# EAGLE board citizen_science_flora (EAGLE 9.6.2), part 1 of 2
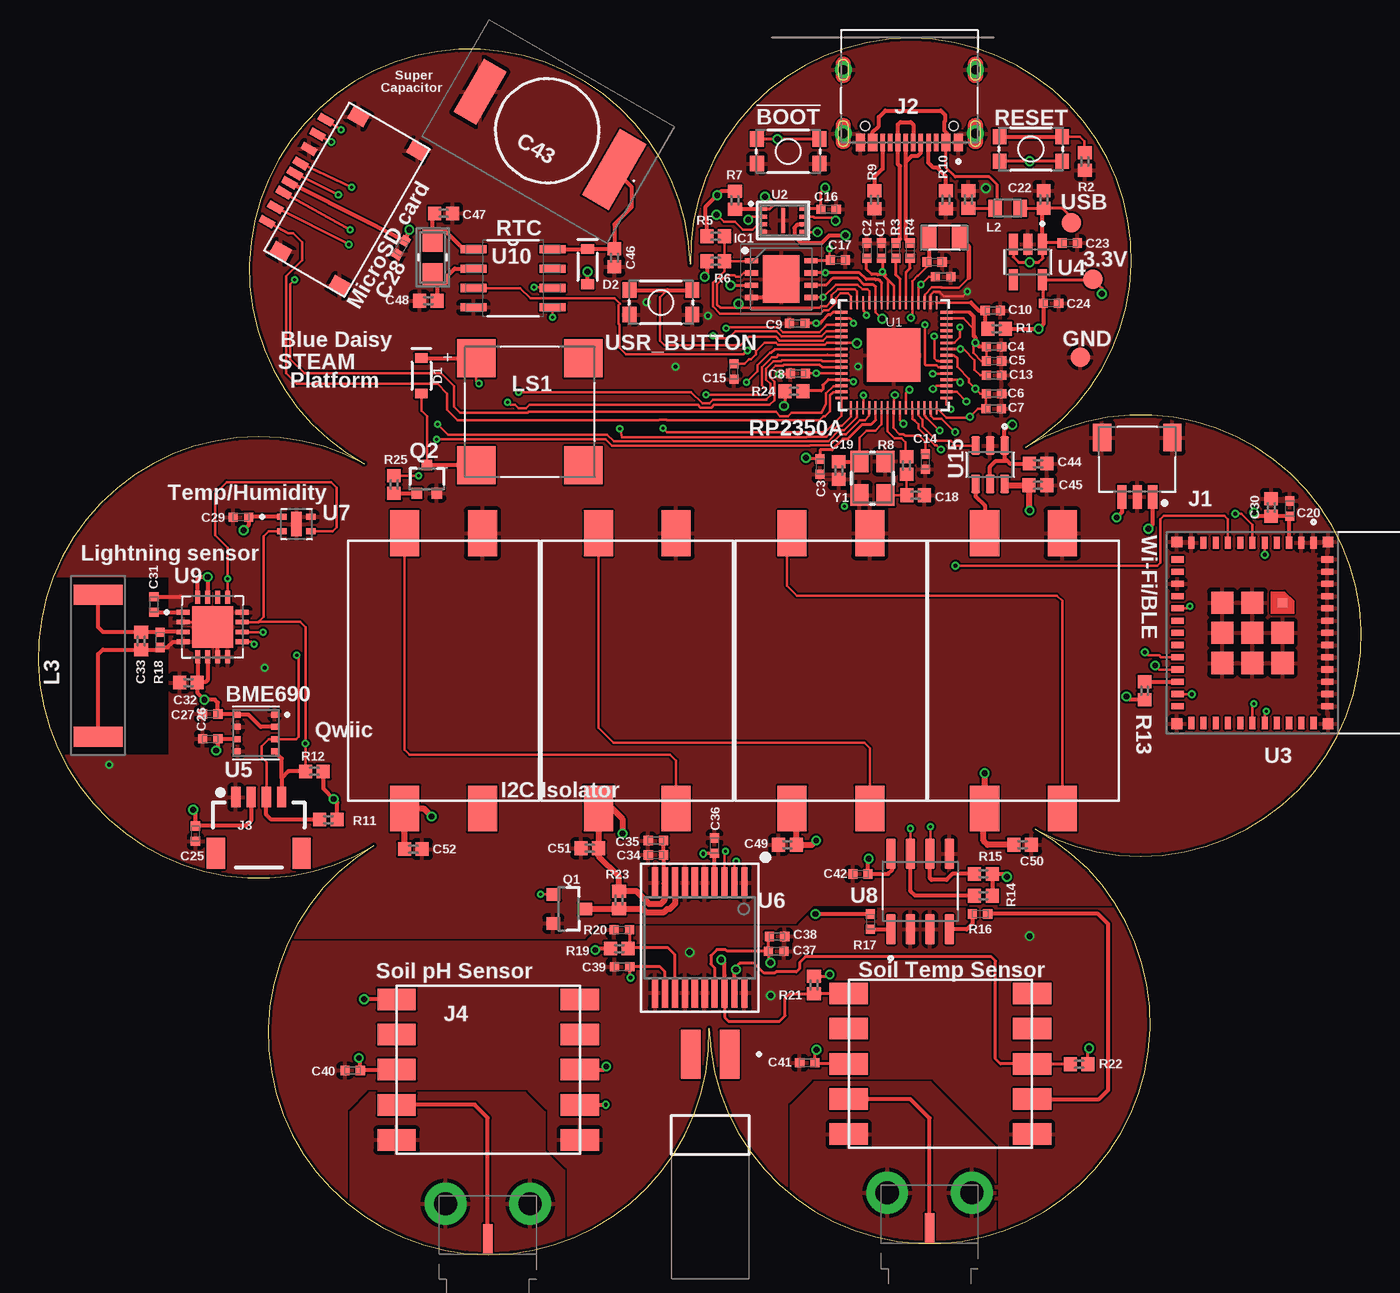
[diagram p0: board, top side]
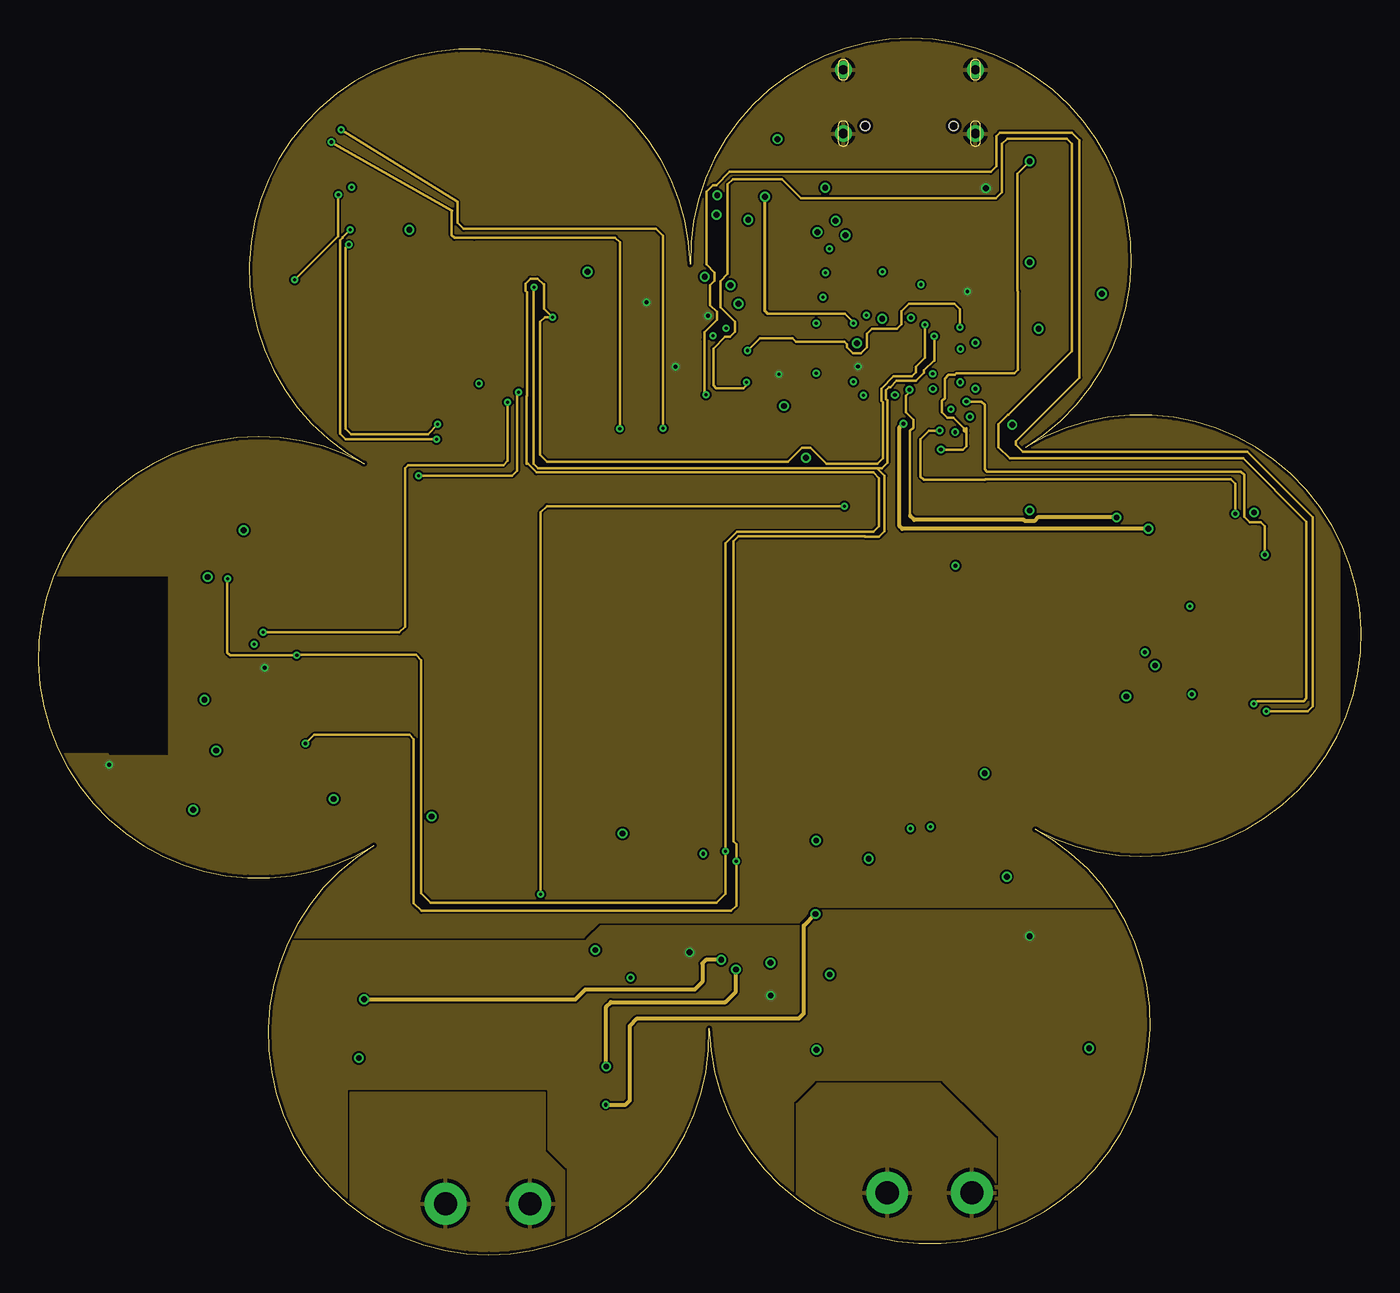
[diagram p1: board, inner layer Route2]
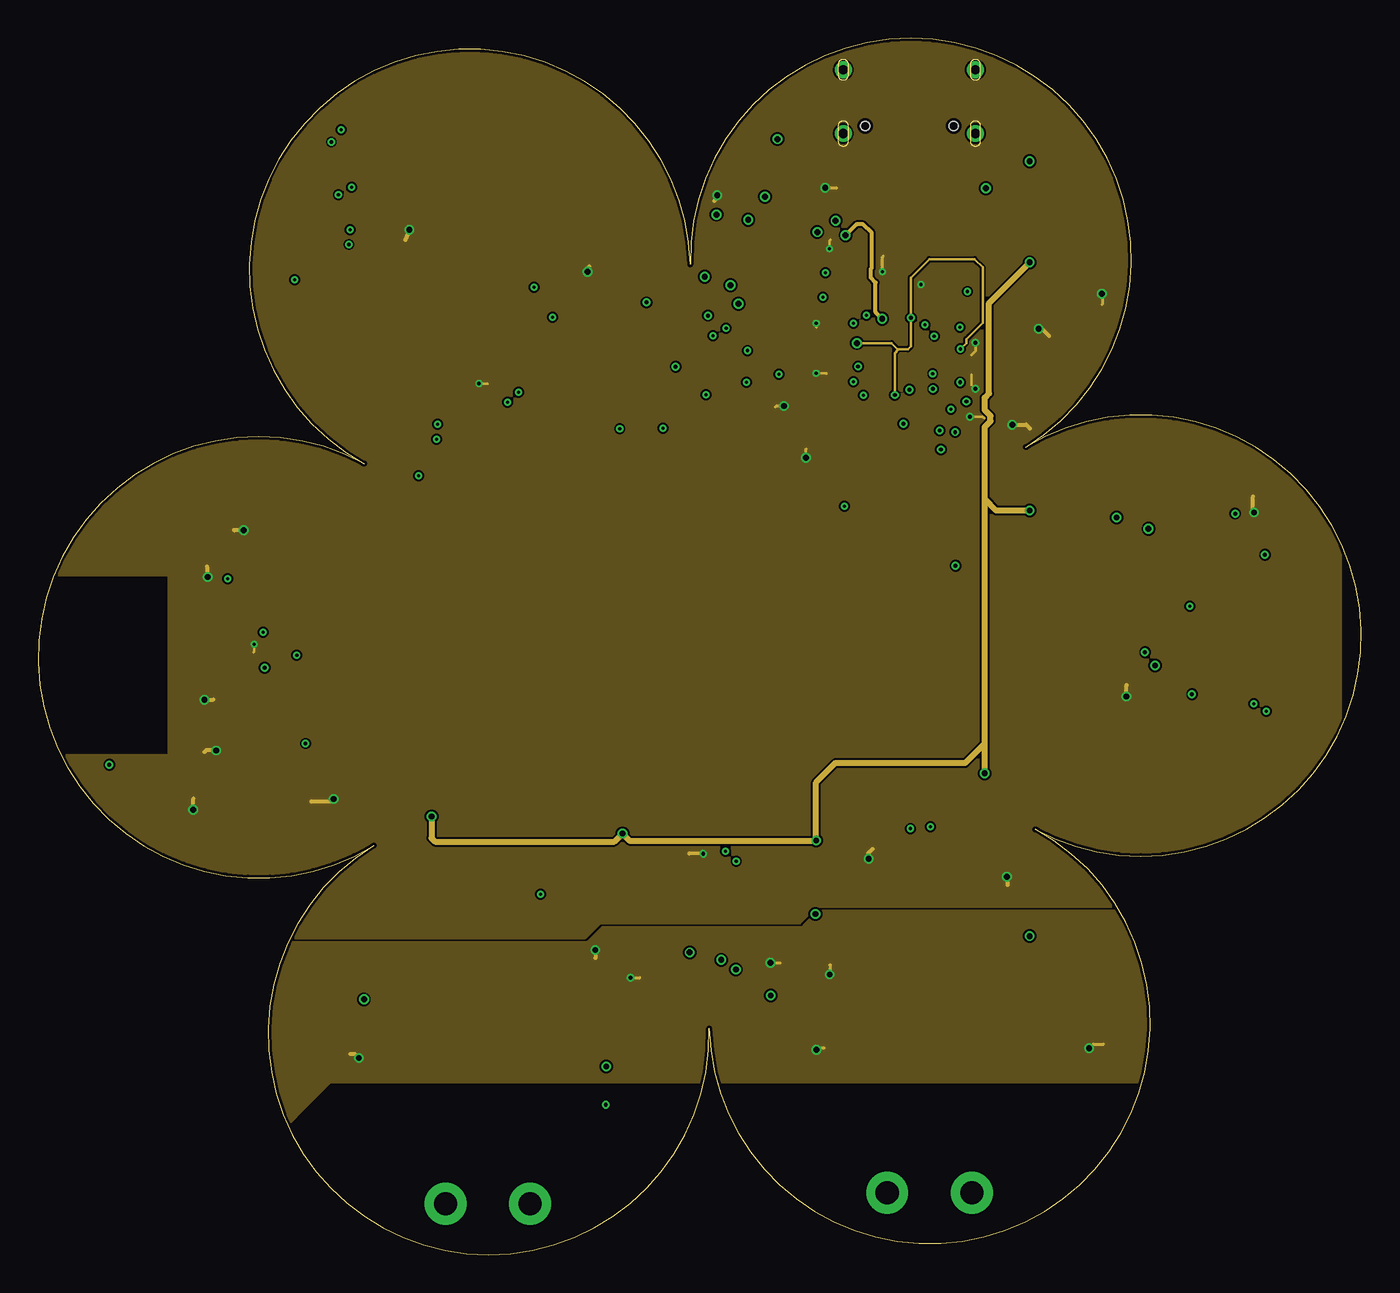
[diagram p2: board, inner layer Route15]
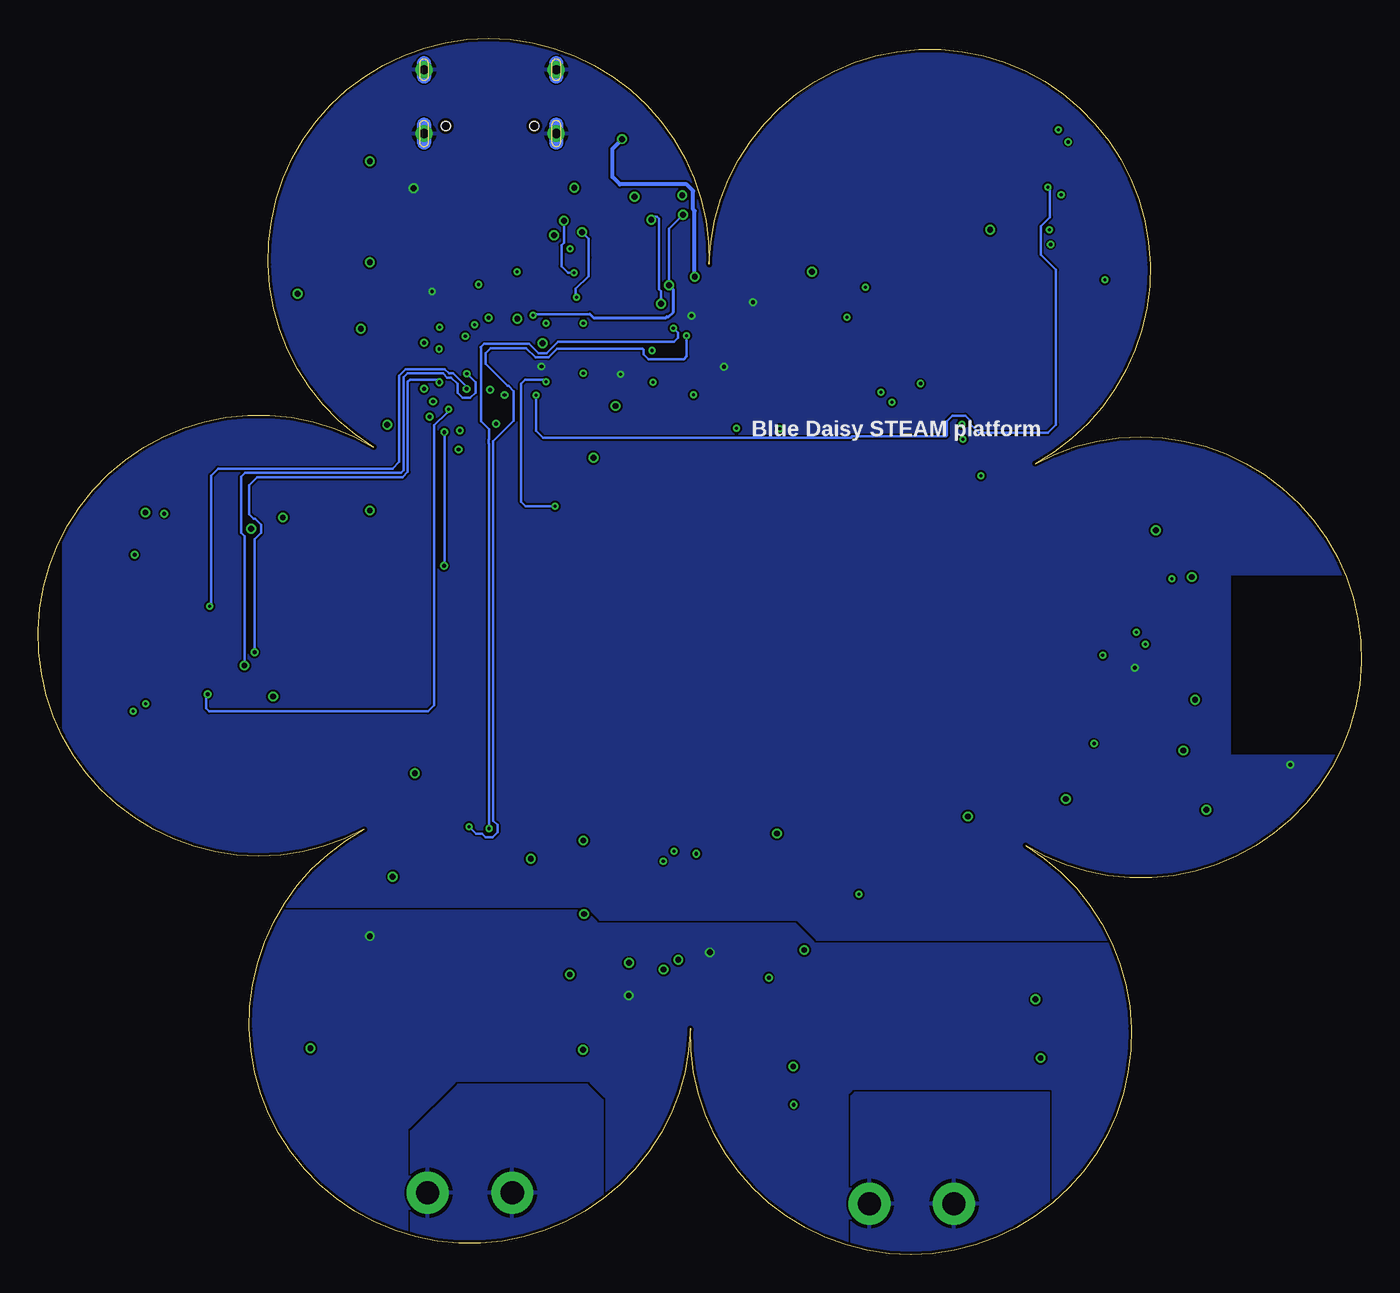
[diagram p3: board, bottom side, seen from below]

Size 86.58 x 79.57 mm. Coordinates in mm from the lower left corner, seen from the top.
Outline: 42.67,64.78 arc240 21.34,51.74 arc240 21.95,26.75 arc240 43.91,14.79 arc240 65.24,27.82 arc240 64.62,52.82 arc240 42.67,64.78
Copper layers (1+2*15+16): Top 0.035mm / dielectric 0.2mm / Route2 0.0175mm / dielectric 1.065mm / Route15 0.0175mm / dielectric 0.2mm / Bottom 0.035mm
Design rules "jlcpcb-4layers": minimum track width 3.5mil, minimum drill 0.2mm, track to track 5mil, track to pad 0.2mm, pad to pad 5mil, via to via 0.5mm, smd to smd 5mil, copper to edge 0.2mm, drill to drill 6mil, minimum pad ring 10mil, minimum via ring 0.13mm, stop-mask expansion 0.05mm, vias tented up to drill 16mil, thermal gap 10mil

## Footprints (pad centres in the part's own frame; a part is rotated, then mirrored left to right if it is on the bottom)
B1,27 = smd 1.27 x 1.27: TP 0,0
TACTILE_SWITCH_SMD_4.6X2.8MM = smd 0.9 x 1: 1 -2.05,-0.8; 2 2.05,-0.8; 3 2.05,0.8; 4 -2.05,0.8
0402-TIGHT = smd 0.6 x 0.6: 1 -0.5,0; 2 0.5,0
0402 = smd 0.85 x 0.9: 1 -0.58,0; 2 0.58,0
RSCSK2043R3D01004T = smd 5 x 2: 1 0,5.075 | smd 4 x 1.7: 2 0,-5.075
SOD-323 = smd 0.63 x 0.83: A 1.15,0; C -1.15,0
SON80P400X400X50-9N = smd 0.85 x 0.35: 1 -1.95,1.2; 2 -1.95,0.4; 3 -1.95,-0.4; 4 -1.95,-1.2; 5 1.95,-1.2; 6 1.95,-0.4; 7 1.95,0.4; 8 1.95,1.2 | smd 2.4 x 3.1: 9 0,0
JST_SM03B-SRSS-TB(LF)(SN) = smd 0.6 x 1.55: 1 -1,0; 2 0,0; 3 1,0 | smd 1.2 x 1.8: S1 -2.3,-3.875; S2 2.3,-3.875
HRO_TYPE-C-31-M-12 = smd 0.6 x 1.14: A1_B12 -3.2,4.75; A4_B9 -2.4,4.75; B1_A12 3.2,4.75; B4_A9 2.4,4.75 | smd 0.3 x 1.14: A5 -1.25,4.75; A6 -0.25,4.75; A7 0.25,4.75; A8 1.25,4.75; B5 1.75,4.75; B6 0.75,4.75; B7 -0.75,4.75; B8 -1.75,4.75 | drill 0.6 pad 0.9: S1 -4.325,4.17; S2 4.325,4.17; S3 -4.325,0; S4 4.325,0 | hole 0.6: -2.89,3.68; 2.89,3.68
1X04_1MM_RA = smd 0.6 x 1.35: 1 -1.5,0; 2 -0.5,0; 3 0.5,0; 4 1.5,0 | smd 1.2 x 2: NC1 2.8,-3.675; NC2 -2.8,-3.675
60312202114511 = smd 0.61 x 1.97: 1 0,-2.325 | drill 1.52: 2 -2.77,0; 3 2.77,0
SAMTEC_TSM-102-02-S-SH = smd 1.27 x 3.18: 01 -1.27,-5.28; 02 1.27,-5.28
INDC1608X100N = smd 0.89 x 1.11: 1 -0.814,0; 2 0.814,0
MA5532-AE = smd 1.3 x 3.2: 1 -4.65,0; 2 4.65,0
IND_LQH2MCN120K02L = smd 1 x 1.6: 1 -1,0; 2 1,0
XDCR_CMT-8504-100-SMT-TR = smd 2.5 x 2.5: 1 3.5,3.5; 2 3.5,-3.5; N -3.5,-3.5; P -3.5,3.5
SOT23-3 = smd 0.8 x 0.9: 1 -0.95,-1; 2 0.95,-1; 3 0,1.1
SOT323 = smd 0.7 x 0.7: 1 -0.65,-0.925; 2 0.65,-0.925; 3 0,0.925
RP2350A = smd 0.875 x 0.2: 1 -3.437,2.8; 2 -3.437,2.4; 3 -3.437,2; 4 -3.437,1.6; 5 -3.437,1.2; 6 -3.437,0.8; 7 -3.437,0.4; 8 -3.437,0; 9 -3.437,-0.4; 10 -3.437,-0.8; 11 -3.437,-1.2; 12 -3.437,-1.6; 13 -3.437,-2; 14 -3.437,-2.4; 15 -3.437,-2.8; 31 3.437,-2.8; 32 3.437,-2.4; 33 3.437,-2; 34 3.437,-1.6; 35 3.437,-1.2; 36 3.437,-0.8; 37 3.437,-0.4; 38 3.437,0; 39 3.437,0.4; 40 3.437,0.8; 41 3.437,1.2; 42 3.437,1.6; 43 3.437,2; 44 3.437,2.4; 45 3.437,2.8 | smd 0.2 x 0.875: 16 -2.8,-3.437; 17 -2.4,-3.437; 18 -2,-3.437; 19 -1.6,-3.437; 20 -1.2,-3.437; 21 -0.8,-3.437; 22 -0.4,-3.437; 23 0,-3.437; 24 0.4,-3.437; 25 0.8,-3.437; 26 1.2,-3.437; 27 1.6,-3.437; 28 2,-3.437; 29 2.4,-3.437; 30 2.8,-3.437; 46 2.8,3.437; 47 2.4,3.437; 48 2,3.437; 49 1.6,3.437; 50 1.2,3.437; 51 0.8,3.437; 52 0.4,3.437; 53 0,3.437; 54 -0.4,3.437; 55 -0.8,3.437; 56 -1.2,3.437; 57 -1.6,3.437; 58 -2,3.437; 59 -2.4,3.437; 60 -2.8,3.437 | smd 3.5 x 3.5: EPAD 0,0
APS6404L-3SQR-ZR = smd 0.4 x 0.25: 1 -1.25,0.75; 2 -1.25,0.25; 3 -1.25,-0.25; 4 -1.25,-0.75; 5 1.25,-0.75; 6 1.25,-0.25; 7 1.25,0.25; 8 1.25,0.75 | smd 0.2 x 1.6: 9 0,0
XCVR_ESP32-C3-MINI-1-N4 = smd 0.8 x 0.4: 1 -5.9,1.3; 2 -5.9,0.5; 3 -5.9,-0.3; 4 -5.9,-1.1; 5 -5.9,-1.9; 6 -5.9,-2.7; 7 -5.9,-3.5; 8 -5.9,-4.3; 9 -5.9,-5.1; 10 -5.9,-5.9; 11 -5.9,-6.7; 25 5.9,-6.7; 26 5.9,-5.9; 27 5.9,-5.1; 28 5.9,-4.3; 29 5.9,-3.5; 30 5.9,-2.7; 31 5.9,-1.9; 32 5.9,-1.1; 33 5.9,-0.3; 34 5.9,0.5; 35 5.9,1.3 | smd 0.4 x 0.8: 12 -4.8,-7.6; 13 -4,-7.6; 14 -3.2,-7.6; 15 -2.4,-7.6; 16 -1.6,-7.6; 17 -0.8,-7.6; 18 0,-7.6; 19 0.8,-7.6; 20 1.6,-7.6; 21 2.4,-7.6; 22 3.2,-7.6; 23 4,-7.6; 24 4.8,-7.6; 36 4.8,2.2; 37 4,2.2; 38 3.2,2.2; 39 2.4,2.2; 40 1.6,2.2; 41 0.8,2.2; 42 0,2.2; 43 -0.8,2.2; 44 -1.6,2.2; 45 -2.4,2.2; 46 -3.2,2.2; 47 -4,2.2; 48 -4.8,2.2 | smd 0.6 x 0.6: 49_1 -1.975,-0.725 | smd 1.45 x 1.45: 49_2 0,-0.725; 49_3 1.975,-0.725; 49_4 1.975,-2.7; 49_5 1.975,-4.675; 49_6 0,-4.675; 49_7 -1.975,-4.675; 49_8 -1.975,-2.7; 49_9 0,-2.7 | smd 0.7 x 0.7: 50 5.95,2.25; 51 5.95,-7.65; 52 -5.95,-7.65; 53 -5.95,2.25
SOT95P280X145-5N = smd 1.39 x 0.58: 1 -1.165,0.95; 2 -1.165,0; 3 -1.165,-0.95; 4 1.165,-0.95; 5 1.165,0.95
IC_BME688 = smd 0.4 x 0.4: 1 1.2,1.2; 2 1.2,0.4; 3 1.2,-0.4; 4 1.2,-1.2; 5 -1.2,-1.2; 6 -1.2,-0.4; 7 -1.2,0.4; 8 -1.2,1.2
SSOP20 = smd 0.4 x 2: P1 -2.925,-3.6; P2 -2.275,-3.6; P3 -1.625,-3.6; P4 -0.975,-3.6; P5 -0.325,-3.6; P6 0.325,-3.6; P7 0.975,-3.6; P8 1.625,-3.6; P9 2.275,-3.6; P10 2.925,-3.6; P11 2.925,3.6; P12 2.275,3.6; P13 1.625,3.6; P14 0.975,3.6; P15 0.325,3.6; P16 -0.325,3.6; P17 -0.975,3.6; P18 -1.625,3.6; P19 -2.275,3.6; P20 -2.925,3.6
XDCR_ENS210-LQFM = smd 0.6 x 0.4: 1 -0.95,0.475; 2 -0.95,-0.475; 3 0.95,-0.475; 4 0.95,0.475 | smd 0.7 x 1.6: 5 0,0
SOIC127P599X175-8N = smd 1.97 x 0.6: 1 -2.47,1.905; 2 -2.47,0.635; 3 -2.47,-0.635; 4 -2.47,-1.905; 5 2.47,-1.905; 6 2.47,-0.635; 7 2.47,0.635; 8 2.47,1.905
QFN65P400X400X80-17N = smd 0.84 x 0.32: 1 -1.935,0.975; 2 -1.935,0.325; 3 -1.935,-0.325; 4 -1.935,-0.975; 9 1.935,-0.975; 10 1.935,-0.325; 11 1.935,0.325; 12 1.935,0.975 | smd 0.32 x 0.84: 5 -0.975,-1.935; 6 -0.325,-1.935; 7 0.325,-1.935; 8 0.975,-1.935; 13 0.975,1.935; 14 0.325,1.935; 15 -0.325,1.935; 16 -0.975,1.935 | smd 2.7 x 2.7: 17 0,0
SOIC127P600X175-8N = smd 1.702 x 0.533: 1 -2.591,1.905; 2 -2.591,0.635; 3 -2.591,-0.635; 4 -2.591,-1.905; 5 2.591,-1.905; 6 2.591,-0.635; 7 2.591,0.635; 8 2.591,1.905
OPS-S56AAF5 = smd 1.9 x 3: P$1 -2.54,-9; P$2 2.54,-9; P$3 2.54,9; P$4 -2.54,9
SOT95P280X145-6N = smd 1.21 x 0.58: 1 -1.255,0.95; 2 -1.255,0; 3 -1.255,-0.95; 4 1.255,-0.95; 5 1.255,0; 6 1.255,0.95
MICROSDCARD = smd 0.5 x 1: G1 0.2,0; P1 3.85,0; P2 2.75,0; P3 1.65,0; P4 0.9,0; P5 -0.55,0; P6 -1.65,0; P7 -2.75,0; P8 -3.85,0 | smd 0.95 x 1.2: P$1 -5.1,1.75; P$2 -5.1,6.2; P$3 5.1,6.2; P$4 5.1,1.75
PH_SENSOR = smd 2.5 x 1.4: P$1 -6,4.6; P$2 -6,2.3; P$3 -6,0; P$4 -6,-2.3; P$5 -6,-4.6; P$6 6,-4.6; P$7 6,-2.3; P$8 6,0; P$9 6,2.3; P$10 6,4.6
XTAL_FC-135_EPS = smd 1.422 x 1.295: 1 -1.092,0; 2 1.092,0
CRYSTAL-SMD-3.2X2.5MM = smd 1.4 x 1.2: 1 -1.1,-0.85; 2 1.1,-0.85; 3 1.1,0.85; 4 -1.1,0.85

## Placement (x,y rotation side)
3.3V  TPB1,27  [B1,27]  69.02,63.81 0 top
!BOOT  MOMENTARY-SWITCH-SPST-SMD-4.6X2.8MM  [TACTILE_SWITCH_SMD_4.6X2.8MM]  49.08,72.17 0 top
C1  0.1uF  [0402-TIGHT]  55.18,65.67 90 top
C2  0.1uF  [0402-TIGHT]  54.24,65.67 90 top
C3  0.1uF  [0402-TIGHT]  51.16,51.54 270 top
C4  0.1uF  [0402-TIGHT]  62.54,59.39 0 top
C5  0.1uF  [0402-TIGHT]  62.54,58.45 0 top
C6  0.1uF  [0402-TIGHT]  62.54,56.32 0 top
C7  0.1uF  [0402-TIGHT]  62.52,55.33 0 top
C8  0.1uF  [0402-TIGHT]  49.71,57.64 180 top
C9  0.1uF  [0402-TIGHT]  49.66,60.92 180 top
C10  4.7uF  [0402-TIGHT]  62.47,61.75 0 top
C11  4.7uF  [0402-TIGHT]  58.66,64.93 0 top
C12  4.7uF  [0402-TIGHT]  59.21,63.96 0 top
C13  0.1uF  [0402-TIGHT]  62.54,57.51 0 top
C14  4.7uF  [0402-TIGHT]  58.05,51.87 270 top
C15  0.1uF  [0402-TIGHT]  45.52,57.77 270 top
C16  0.1uF  [0402-TIGHT]  51.72,68.38 0 top
C17  0.1uF  [0402-TIGHT]  52.33,65.06 180 top
C18  15pF  [0402]  57.41,49.66 0 top
C19  15pF  [0402]  52.38,51.29 270 top
C20  10uF  [0402-TIGHT]  81.9,48.8 90 top
C21  0.1uF  [0402]  60.86,69.02 90 top
C22  0.1uF  [0402]  65.79,69.02 90 top
C23  10uF  [0402-TIGHT]  67.49,66.17 180 top
C24  10uF  [0402-TIGHT]  66.28,62.24 180 top
C25  0.1uF  [0402-TIGHT]  10.29,27.54 270 top
C26  0.1uF  [0402-TIGHT]  11.26,33.74 180 top
C27  0.1uF  [0402-TIGHT]  11.26,35.36 180 top
C28  0.1uF  [0402-TIGHT]  23.76,65.87 240 top
C29  0.1uF  [0402-TIGHT]  13.27,48.24 180 top
C30  0.1uF  [0402]  80.68,48.88 90 top
C31  10uF  [0402-TIGHT]  7.58,42.53 90 top
C32  1.0uF  [0402]  9.84,37.42 180 top
C33  1nF  [0402]  6.74,40.14 270 top
C34  0.1uF  [0402-TIGHT]  40.42,26.14 0 top
C35  10uF  [0402-TIGHT]  40.42,27.08 0 top
C36  0.1uF  [0402-TIGHT]  44.25,26.75 270 top
C37  10uF  [0402-TIGHT]  48.29,19.84 0 top
C38  0.1uF  [0402-TIGHT]  48.34,20.81 0 top
C39  0.1uF  [0402-TIGHT]  38.21,18.83 180 top
C40  0.1uF  [0402-TIGHT]  20.58,12.05 0 top
C41  0.1uF  [0402-TIGHT]  50.32,12.55 0 top
C42  0.1uF  [0402-TIGHT]  53.8,24.9 0 top
C43  RSCSK2043R3D01004T  [RSCSK2043R3D01004T]  33.31,73.51 240 top
C44  0.1uF  [0402]  65.44,51.75 180 top
C45  0.1uF  [0402]  65.41,50.32 0 top
C46  0.1uF  [0402]  37.7,65.21 270 top
C47  12pF  [0402]  26.52,68.1 180 top
C48  12pF  [0402]  25.53,62.39 0 top
C49  0.1uF  [0402]  49.03,26.8 180 top
C50  0.1uF  [0402]  64.42,26.8 0 top
C51  0.1uF  [0402]  36.1,26.58 180 top
C52  0.1uF  [0402]  24.54,26.52 0 top
D1  1N4148  [SOD-323]  25.08,57.49 270 top
D2  1N5819  [SOD-323]  35.95,64.62 270 top
GND  TPB1,27  [B1,27]  68.18,58.71 0 top
IC1  W25Q64JVXGIQ  [SON80P400X400X50-9N]  48.62,63.81 0 top
J1  SM03B-SRSS-TB(LF)(SN)  [JST_SM03B-SRSS-TB(LF)(SN)]  71.91,49.56 180 top
J2  TYPE-C-31-M-12  [HRO_TYPE-C-31-M-12]  57,77.5 180 top
J3  [1X04_1MM_RA]  14.43,29.93 0 top
J4  60312202114511  [60312202114511]  29.42,3.33 0 top
J5  60312202114511  [60312202114511]  58.32,4.05 0 top
J6  TSM-102-02-S-SH  [SAMTEC_TSM-102-02-S-SH]  43.97,7.83 180 top
L2  LQW18AN2N2D10D  [INDC1608X100N]  63.43,68.43 0 top
L3  MA5532-AE  [MA5532-AE]  3.92,38.51 90 top
L4  3.3uH  [IND_LQH2MCN120K02L]  59.29,66.53 180 top
LS1  MLT-8530  [XDCR_CMT-8504-100-SMT-TR]  32.16,55.12 0 top
Q1  220mA/50V/3.5Ω  [SOT23-3]  34.7,22.61 270 top
Q2  BSS138  [SOT323]  25.43,50.73 0 top
R1  33  [0402]  62.72,60.56 180 top
R2  1K  [0402]  68.48,71.51 270 top
R3  27  [0402-TIGHT]  56.12,65.67 270 top
R4  27  [0402-TIGHT]  57.05,65.67 270 top
R5  [0402]  44.33,66.61 180 top
R6  1K  [0402]  44.33,64.98 0 top
R7  10k  [0402]  45.6,68.97 270 top
R8  1K  [0402]  56.83,51.62 90 top
R9  5.1k  [0402]  54.72,68.99 90 top
R10  5.1k  [0402]  59.39,68.99 90 top
R11  DNF  [0402]  18.98,28.45 0 top
R12  2.2K  [0402]  18.07,31.6 0 top
R13  10k  [0402]  72.4,36.89 270 top
R14  1K  [0402]  61.86,23.48 0 top
R15  1K  [0402]  61.86,24.9 0 top
R16  100  [0402-TIGHT]  61.63,22.28 180 top
R17  100  [0402-TIGHT]  54.46,21.77 270 top
R18  10K  [0402-TIGHT]  7.98,40.21 90 top
R19  16.9K  [0402]  38.03,20.02 180 top
R20  10K  [0402-TIGHT]  38.18,21.24 0 top
R21  2.2K  [0402]  50.76,17.63 90 top
R22  2.2K  [0402]  68.1,12.45 0 top
R23  1M  [0402]  38,23.2 90 top
R24  1M  [0402]  49.46,56.47 180 top
R25  470  [0402]  23.27,50.37 90 top
RESET  MOMENTARY-SWITCH-SPST-SMD-4.6X2.8MM  [TACTILE_SWITCH_SMD_4.6X2.8MM]  64.95,72.32 0 top
U1  RP2350A  [RP2350A]  55.99,58.83 0 top
U2  APS6404L-3SQR-ZR  [APS6404L-3SQR-ZR]  48.75,67.65 0 top
U3  ESP32-C3-MINI-1-N4  [XCVR_ESP32-C3-MINI-1-N4]  82.15,40.67 270 top
U4  MIC5504-3.3YM5-T5  [SOT95P280X145-5N]  64.75,64.93 270 top
U5  BME690  [IC_BME688]  14.26,34.12 0 top
U6  ADM3260ARSZ  [SSOP20]  43.29,20.73 180 top
U7  ENS210-LQFM  [XDCR_ENS210-LQFM]  16.9,47.78 0 top
U8  SFH6325-X017TEL0631  [SOIC127P599X175-8N]  57.72,23.76 90 top
U9  AS3935-BQFT  [QFN65P400X400X80-17N]  11.41,41.05 0 top
U10  PCF8563T/F4,118  [SOIC127P600X175-8N]  31.07,63.86 0 top
U11  OPS-S56AAF5  [OPS-S56AAF5]  64.47,38.18 0 top
U12  OPS-S56AAF5  [OPS-S56AAF5]  51.87,38.18 0 top
U13  OPS-S56AAF5  [OPS-S56AAF5]  39.2,38.18 0 top
U14  OPS-S56AAF5  [OPS-S56AAF5]  26.52,38.18 0 top
U15  SN74LVC1T45DBVRG4  [SOT95P280X145-6N]  62.29,51.67 270 top
U$1  TF-123-ARP9HXX  [MICROSDCARD]  16.9,70.9 240 top
U$2  PH-OEM  [PH_SENSOR]  29.45,12.1 0 top
U$3  PH-OEM  [PH_SENSOR]  59.04,12.48 0 top
USB  V_USB  [B1,27]  67.6,67.49 0 top
USR_BUTTON  MOMENTARY-SWITCH-SPST-SMD-4.6X2.8MM  [TACTILE_SWITCH_SMD_4.6X2.8MM]  40.75,62.29 180 top
XTAL1  Q13FC1350000400  [XTAL_FC-135_EPS]  25.81,65.23 90 top
Y1  12MHz  [CRYSTAL-SMD-3.2X2.5MM]  54.59,50.78 270 top

## Library data of the parts
3.3V GND USB = testpad
!BOOT RESET USR_BUTTON = SparkFun-Switches; PROD_ID: SWCH-15606
C1-C9 C13 C15-C17 C25-C29 C34 C36 C38-C42 = SparkFun-Capacitors; PROD_ID: CAP-16507
C10-C12 C14 = SparkFun-Capacitors; PROD_ID: CAP-14240
C18 C19 = SparkFun-Capacitors; PROD_ID: CAP-13063
C20 C23 C24 C31 C35 C37 = SparkFun-Capacitors; PROD_ID: CAP-14848
C21 C22 C30 C44-C46 C49-C52 = SparkFun-Capacitors; PROD_ID: CAP-14993
C32 = SparkFun-Capacitors; PROD_ID: CAP-12417
C33 = SparkFun-Capacitors; PROD_ID: CAP-15061
C43 = SamacSys_Parts; DESCRIPTION: Supercapacitors / Ultracapacitors 0.2F 3.3V -20+80; HEIGHT: 1.8mm; MANUFACTURER_NAME: Elna; MANUFACTURER_PART_NUMBER: RSCSK2043R3D01004T; MOUSER_PART_NUMBER: 555-DSK3R3H204T614H2; MOUSER_PRICE-STOCK: https://www.mouser.co.uk/ProductDetail/Elna/RSCSK2043R3D01004T?qs=4ASt3YYao0W6joWWDTvrLg%3D%3D
C47 C48 = SparkFun-Capacitors; PROD_ID: CAP-14665
D1 = SparkFun-DiscreteSemi; PROD_ID: DIO-14072
D2 = SparkFun-DiscreteSemi; PROD_ID: DIO-11623
IC1 = SamacSys_Parts; DESCRIPTION: 64M-bit Serial Flash Memory with uniform 4KB sectors and Dual/Quad SPI; HEIGHT: 0.5mm; MANUFACTURER_NAME: Winbond; MANUFACTURER_PART_NUMBER: W25Q64JVXGIQ
J1 = SM03B-SRSS-TB_LF__SN_; AVAILABILITY: In Stock; CHECK_PRICES: https://www.snapeda.com/parts/SM03B-SRSS-TB(LF)(SN)/JST+Sales+America+Inc./view-part/?ref=eda; DESCRIPTION: Connector Header Surface Mount, Right Angle 3 position 0.039 (1.00mm); MF: JST Sales America Inc.; MP: SM03B-SRSS-TB(LF)(SN); PACKAGE: None; PRICE: None; SNAPEDA_LINK: https://www.snapeda.com/parts/SM03B-SRSS-TB(LF)(SN)/JST+Sales+America+Inc./view-part/?ref=snap
J2 = TYPE-C-31-M-12; AVAILABILITY: Not in stock; CHECK_PRICES: https://www.snapeda.com/parts/TYPE-C-31-M-12/HRO+Electronics+Co.%252C+Ltd./view-part/?ref=eda; DESCRIPTION: USB Connectors 24 Receptacle 1 8.94*7.3mm RoHS; MF: HRO Electronics Co., Ltd.; MP: TYPE-C-31-M-12; PACKAGE: Package; PRICE: None; SNAPEDA_LINK: https://www.snapeda.com/parts/TYPE-C-31-M-12/HRO+Electronics+Co.%252C+Ltd./view-part/?ref=snap
J3 = SparkFun-Connectors; PROD_ID: CONN-13694
J4 J5 = 60312202114511; AVAILABILITY: In Stock; CHECK_PRICES: https://www.snapeda.com/parts/60312202114511/Wurth+Electronics+Inc./view-part/?ref=eda; DESCRIPTION: SMA Connector Jack, Female Socket 50Ohm Board Edge, End Launch; Through Hole, Right Angle Solder; MF: Wurth Electronics; MP: 60312202114511; PACKAGE: None; PRICE: None; PURCHASE-URL: https://www.snapeda.com/api/url_track_click_mouser/?unipart_id=3995265&manufacturer=Wurth Electronics&part_name=60312202114511&search_term=60312202114511; SNAPEDA_LINK: https://www.snapeda.com/parts/60312202114511/Wurth+Electronics+Inc./view-part/?ref=snap
J6 = TSM-102-02-S-SH; AVAILABILITY: In Stock; DESCRIPTION: TSM - Samtec 2.54mm Single Row Horizontal Surface Mount Header 8.13mm Post Height (02) - Fast Stock; MF: Samtec; MP: TSM-102-02-S-SH; PACKAGE: None; PRICE: None; PURCHASE-URL: https://pricing.snapeda.com/search/part/TSM-102-02-S-SH/?ref=eda
L2 = LQW18AN2N2D10D; AVAILABILITY: In Stock; CHECK_PRICES: https://www.snapeda.com/parts/LQW18AN2N2D10D/Murata/view-part/?ref=eda; DESCRIPTION: Inductor with Inductance: 2.2nH Tol. +/-0.5nH, Package: 0603 (1608); MF: Murata; MP: LQW18AN2N2D10D; PACKAGE: 1608 Murata; PRICE: None; PURCHASE-URL: https://www.snapeda.com/api/url_track_click_mouser/?unipart_id=1503005&manufacturer=Murata&part_name=LQW18AN2N2D10D&search_term=2.2nh 0603; SNAPEDA_LINK: https://www.snapeda.com/parts/LQW18AN2N2D10D/Murata/view-part/?ref=snap
L3 = MA5532-AE; AVAILABILITY: Not in stock; CHECK_PRICES: https://www.snapeda.com/parts/MA5532-AE/Coilcraft/view-part/?ref=eda; DESCRIPTION: RFID transponder coil, SMT, RoHS; MF: Coilcraft; MP: MA5532-AE; PACKAGE: None; PRICE: None; SNAPEDA_LINK: https://www.snapeda.com/parts/MA5532-AE/Coilcraft/view-part/?ref=snap
L4 = LQH2MCN120K02L; AVAILABILITY: In Stock; CHECK_PRICES: https://www.snapeda.com/parts/LQH2MCN120K02L/Murata/view-part/?ref=eda; DESCRIPTION: Inductor with Inductance: 12uH Tol. +/-10%, Package: 0806 (2016); MF: Murata; MP: LQH2MCN120K02L; PACKAGE: NONSTANDARD; PRICE: None; SNAPEDA_LINK: https://www.snapeda.com/parts/LQH2MCN120K02L/Murata/view-part/?ref=snap
LS1 = CMT-8504-100-SMT-TR; MANUFACTURER: CUI Inc.; MAXIMUM_PACKAGE_HEIGHT: 4.00mm; PARTREV: 1.0; STANDARD: Manufacturer Recommendations
Q1 = SparkFun-DiscreteSemi; PROD_ID: TRANS-00830
Q2 = SparkFun-DiscreteSemi; PROD_ID: TRANS-11151
R1 = SparkFun-Resistors; PROD_ID: RES-14883
R2 R6 R8 R14 R15 = SparkFun-Resistors; PROD_ID: RES-14342
R3 R4 = SparkFun-Resistors; PROD_ID: RES-15238
R5 R19 = SparkFun-Resistors
R7 R13 R25 = SparkFun-Resistors; PROD_ID: RES-14241
R9 R10 = SparkFun-Resistors; PROD_ID: RES-14340
R11 R12 R21 R22 = SparkFun-Resistors; PROD_ID: RES-14341
R16 R17 = SparkFun-Resistors; PROD_ID: RES-14962
R18 R20 = SparkFun-Resistors; PROD_ID: RES-16147
R23 R24 = SparkFun-Resistors; PROD_ID: RES-15185
U1 = RP2350A; PROD_ID: IC-21276
U2 = RP2350A; PROD_ID: IC-21870
U3 = ESP32-C3-MINI-1-N4; AVAILABILITY: In Stock; DESCRIPTION: Bluetooth, WiFi 802.11b/g/n, Bluetooth v5.0 Transceiver Module 2.412GHz ~ 2.484GHz PCB Trace Surface Mount; MF: Espressif Systems; MP: ESP32-C3-MINI-1-N4; PACKAGE: SMD-53 Espressif Systems; PRICE: None; PURCHASE-URL: https://pricing.snapeda.com/search/part/ESP32-C3-MINI-1-N4/?ref=eda
U4 = MIC5504-3.3YM5-T5; AVAILABILITY: In Stock; CHECK_PRICES: https://www.snapeda.com/parts/MIC5504-3.3YM5-T5/Microchip/view-part/?ref=eda; DESCRIPTION: Linear Voltage Regulator IC Positive Fixed 1 Output 300mA SOT-23-5; MF: Microchip; MP: MIC5504-3.3YM5-T5; PACKAGE: SOT-23-5 Microchip; PRICE: None; SNAPEDA_LINK: https://www.snapeda.com/parts/MIC5504-3.3YM5-T5/Microchip/view-part/?ref=snap
U5 = BME690; AVAILABILITY: In Stock; DESCRIPTION: Gas sensor measuring relative humidity, barometric pressure, ambient temperature and gas (VOC); MF: Bosch Sensortec; MP: BME688; PACKAGE: None; PRICE: None; PURCHASE-URL: https://pricing.snapeda.com/search/part/BME688/?ref=eda
U6 = ADM3260ARSZ; AVAILABILITY: In Stock; CHECK_PRICES: https://www.snapeda.com/parts/ADM3260ARSZ/Analog+Devices/view-part/?ref=eda; DESCRIPTION: Hot Swappable, Dual I2C Isolators with Integrated DC-to-DC Converter; MF: Analog Devices; MP: ADM3260ARSZ; PACKAGE: SSOP-20 Analog Devices; PRICE: None; PURCHASE-URL: https://www.snapeda.com/api/url_track_click_mouser/?unipart_id=474198&manufacturer=Analog Devices&part_name=ADM3260ARSZ&search_term=adm3260; SNAPEDA_LINK: https://www.snapeda.com/parts/ADM3260ARSZ/Analog+Devices/view-part/?ref=snap
U7 = ENS210-LQFM; AVAILABILITY: In Stock; CHECK_PRICES: https://www.snapeda.com/parts/ENS210-LQFM/ScioSense/view-part/?ref=eda; DESCRIPTION: Digital relative humidity and temperature sensor; MF: ScioSense; MP: ENS210-LQFM; PACKAGE: NON STANDARD-5 ScioSense; PRICE: None; SNAPEDA_LINK: https://www.snapeda.com/parts/ENS210-LQFM/ScioSense/view-part/?ref=snap
U8 = SFH6325-X017T
U9 = AS3935-BQFT; AVAILABILITY: In Stock; CHECK_PRICES: https://www.snapeda.com/parts/AS3935-BQFT/ScioSense/view-part/?ref=eda; DESCRIPTION: Lightning sensor IC with embedded distance estimation algorithm; MF: ScioSense; MP: AS3935-BQFT; PACKAGE: None; PRICE: None; SNAPEDA_LINK: https://www.snapeda.com/parts/AS3935-BQFT/ScioSense/view-part/?ref=snap
U10 = PCF8563T_F4_118; AVAILABILITY: In Stock; CHECK_PRICES: https://www.snapeda.com/parts/PCF8563T/F4,118/NXP+Semiconductors/view-part/?ref=eda; DESCRIPTION: Real Time Clock (RTC) IC Clock/Calendar - I²C, 2-Wire Serial 8-SOIC (0.154, 3.90mm Width); MF: NXP USA; MP: PCF8563T/F4,118; PACKAGE: SOIC-8 NXP Semiconductors; PRICE: None; SNAPEDA_LINK: https://www.snapeda.com/parts/PCF8563T/F4,118/NXP+Semiconductors/view-part/?ref=snap
U11-U14 = OPS=S56AAF5
U15 = SN74LVC1T45DBVRG4; AVAILABILITY: In Stock; CHECK_PRICES: https://www.snapeda.com/parts/SN74LVC1T45DBVRG4/Texas+Instruments/view-part/?ref=eda; DESCRIPTION: Single-Bit Dual-Supply Bus Transceiver with Configurable Voltage-Level Shifting and 3-State Outputs 6-SOT-23 -40 to 85; MF: Texas Instruments; MP: SN74LVC1T45DBVRG4; PACKAGE: SOT-23-6 Texas Instruments; PRICE: None; SNAPEDA_LINK: https://www.snapeda.com/parts/SN74LVC1T45DBVRG4/Texas+Instruments/view-part/?ref=snap
U$1 = xunpu_tf123
U$2 U$3 = pH-OEM
XTAL1 = Q13FC1350000400; AVAILABILITY: In Stock; CHECK_PRICES: https://www.snapeda.com/parts/Q13FC1350000400/EPSON/view-part/?ref=eda; DESCRIPTION: 32.768 kHz ±20ppm Crystal 12.5pF 70 kOhms 2-SMD, No Lead; MF: EPSON; MP: Q13FC1350000400; PACKAGE: None; PRICE: None; SNAPEDA_LINK: https://www.snapeda.com/parts/Q13FC1350000400/EPSON/view-part/?ref=snap
Y1 = SparkFun-Clocks; PROD_ID: XTAL-13518

## Nets
1.1V: C11.1 C13.1 C14.1 C15.1 L4.2 U1.6 U1.23 U1.39 U1.50
3.3V: 3.3V.TP C1.1 C2.1 C3.1 C4.1 C5.1 C6.1 C7.1 C8.1 C9.1 C12.1 C16.1 C17.2 C20.1 C24.2 C25.1 C26.1 C27.1 C28.1 C29.1 C30.1 C32.1 C36.2 C42.2 C44.2 D1.C D2.A IC1.8 J3.2 LS1.P R1.1 R5.2 R7.1 R11.2 R12.2 R13.2 R14.2 R15.2 R24.2 U1.1 U1.11 U1.20 U1.30 U1.38 U1.44 U1.45 U1.49 U1.53 U1.54 U2.8 U3.3 U4.5 U5.2 U5.6 U5.8 U6.P4 U7.1 U8.8 U9.5 U9.6 U9.9 U9.15 U9.16 U15.1 U15.5 U$1.P4
!ESP32_BOOT: U1.31 U3.23
!ESP32_RST: U1.29 U3.8
!FLASH_CS: R7.2 U1.2 U2.1
!QSPI_CS: IC1.1 R5.1 R6.2 U1.60
!RESET: RESET.1 RESET.2 U1.26
!USB_BOOT: !BOOT.3 !BOOT.4 R6.1
BUZZER_DRIVER: R25.2 U1.9
CMD: U1.19 U$1.P3
DAT0: U1.16 U$1.P7
DAT1: U1.15 U$1.P8
DAT2: U1.14 U$1.P1
DAT3: U1.17 U$1.P2
ESP32_CS: U1.33 U3.16
ESP32_HANDSHAKE: U1.28 U3.6
ESP32_MISO: U1.32 U3.5
ESP32_MOSI: U1.35 U3.21
ESP32_RX: U1.7 U3.30
ESP32_SCK: U1.34 U3.20
ESP32_TX: U1.8 U3.31
GND: !BOOT.1 !BOOT.2 C1.2 C2.2 C3.2 C4.2 C5.2 C6.2 C7.2 C8.2 C9.2 C10.2 C11.2 C12.2 C13.2 C14.2 C15.2 C16.2 C17.1 C18.2 C19.2 C20.2 C21.2 C22.2 C23.1 C24.1 C25.2 C26.2 C27.2 C28.2 C29.2 C30.2 C31.2 C32.2 C33.2 C34.1 C35.1 C36.1 C42.1 C43.2 C44.1 C45.2 C46.2 C47.1 C48.1 C49.2 C50.2 C51.2 C52.2 GND.TP IC1.4 IC1.9 J1.2 J1.S1 J1.S2 J2.A1_B12 J2.B1_A12 J2.S1 J2.S2 J2.S3 J2.S4 J3.1 L3.1 Q1.2 Q2.2 R2.2 R9.1 R10.1 R18.1 U1.47 U1.EPAD U2.4 U2.9 U3.1 U3.2 U3.11 U3.14 U3.36 U3.37 U3.38 U3.39 U3.40 U3.41 U3.42 U3.43 U3.44 U3.45 U3.46 U3.47 U3.48 U3.49_1 U3.49_2 U3.49_3 U3.49_4 U3.49_5 U3.49_6 U3.49_7 U3.49_8 U3.49_9 U3.50 U3.51 U3.52 U3.53 U4.2 U5.1 U5.5 U5.7 U6.P1 U6.P5 U6.P7 U6.P10 U7.4 U7.5 U8.5 U9.2 U9.4 U9.7 U9.8 U9.12 U9.17 U10.4 U11.P$3 U12.P$3 U13.P$3 U14.P$3 U15.2 U$1.P6 U$1.P$1 U$1.P$2 U$1.P$3 U$1.P$4 USR_BUTTON.3 USR_BUTTON.4 Y1.2 Y1.4
GND-ISO: C37.2 C38.2 C39.2 C40.1 C41.1 R20.1 U6.P11 U6.P14 U6.P16 U6.P20 U8.2 U8.3 U$2.P$6 U$3.P$6
INT_RTC: U1.40 U10.3
INT_SOIL: R14.1 U1.3 U8.7
INT_SOIL_ISO: R17.1 U$2.P$7
INT_SOILTEMP: R15.1 U1.4 U8.6
INT_SOILTEMP_ISO: R16.1 U$3.P$7
IRQ_LIGHTNING: U1.10 U9.10
N$1: C10.1 R1.2 U1.46
N$2: L4.1 U1.48
N$3: R2.1 RESET.3 RESET.4
N$4: C18.1 R8.1 Y1.3
N$5: R3.2 U1.52
N$6: R4.2 U1.51
N$7: C19.1 U1.21 Y1.1
N$8: R8.2 U1.22
N$9: J2.A5 R10.2
N$10: J2.B5 R9.2
N$11: C21.1 J2.A4_B9 J2.B4_A9 L2.1
N$12: R13.1 U3.22
N$13: R16.2 U8.4
N$14: R17.2 U8.1
N$15: C31.1 U9.1
N$16: C33.1 L3.2 R18.2 U9.3
N$17: R19.1 R20.2 U6.P13
N$22: U11.P$2 U12.P$4
N$23: U12.P$2 U13.P$4
N$24: U13.P$2 U14.P$4
N$25: U1.5 USR_BUTTON.1 USR_BUTTON.2
N$26: D1.A LS1.N Q2.3
N$27: Q2.1 R25.1
N$28: C43.1 C46.1 D2.C U10.8
N$29: C48.2 U10.2 XTAL1.1
N$30: C47.2 U10.1 XTAL1.2
NEOPIXEL_3.3V: U1.27 U15.3
NEOPIXEL_5V: U11.P$4 U15.4
PDIS: Q1.3 R23.1 U6.P8
PDIS_EN: Q1.1 R24.1 U1.12
PRB1: J4.1 U$2.P$4
PRB1_GND: J4.2 J4.3 U$2.P$5
PROBE2: J5.1 U$3.P$4
PROBE2_GND: J5.2 J5.3 U$3.P$5
QSPI_CLK: IC1.6 U1.56 U2.6
SCL: J3.4 R12.1 U1.37 U5.4 U6.P2 U7.2 U9.11 U10.6
SCL_ISO: R22.1 U6.P19 U$2.P$8 U$3.P$8
SD_CLK: U1.18 U$1.P5
SDA: J3.3 R11.1 U1.36 U5.3 U6.P3 U7.3 U9.13 U10.5
SDA_ISO: R21.1 U6.P18 U$2.P$1 U$3.P$1
SIO0: IC1.5 U1.57 U2.5
SIO1: IC1.2 U1.59 U2.2
SIO2: IC1.3 U1.58 U2.3
SIO3: IC1.7 U1.55 U2.7
SWCLK: J1.1 U1.24
SWDIO: J1.3 U1.25
SWITCH: U1.13 U$1.G1
USB_N: J2.A7 J2.B7 R4.1
USB_P: J2.A6 J2.B6 R3.1
V_USB: C22.1 C23.2 C34.2 C35.2 C45.1 C49.1 C50.1 C51.1 C52.1 L2.2 R23.2 U4.1 U4.3 U6.P9 U11.P$1 U12.P$1 U13.P$1 U14.P$1 U15.6 USB.TP
VCC-ISO: C37.1 C38.1 C39.1 C40.2 C41.2 R19.2 R21.2 R22.2 U6.P12 U6.P17 U$2.P$3 U$3.P$3